# Altium PCB EtherWiz_FullSize.PcbDoc (part 2 of 2)
Units mm, origin at the board's own origin, x right, y up, seen from the top; angles counter-clockwise.
Board outline 160 x 100 mm, 4 copper layers (Top Layer, GND, 5V, Bottom Layer), stack 1.741 mm thick; 68 components, 129 nets, 452 pads, 231 vias.
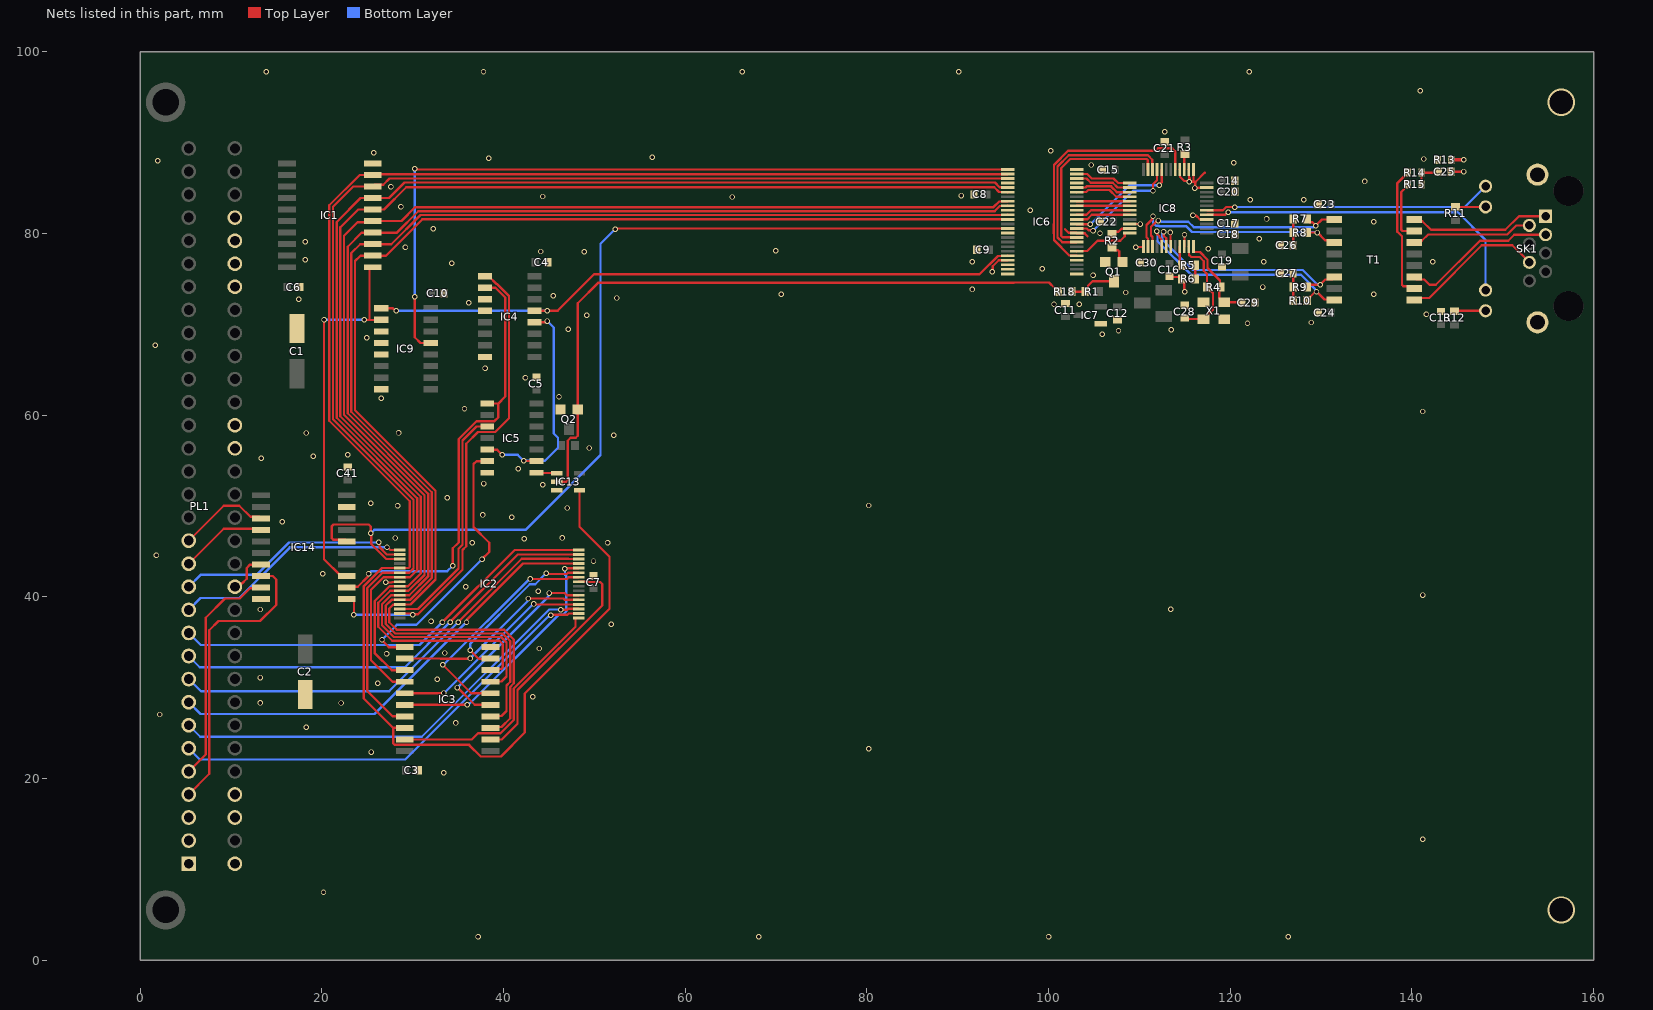
[diagram p4: the nets of this part, all layers, seen from the top]

## Via types
v1: diameter 0.6, hole 0.4, Top Layer to Bottom Layer, tented both sides, 229 vias
v2: diameter 3, hole 2.6, Top Layer to Bottom Layer, 2 vias

## Nets (pads, with @x,y where several pads share a name; then routed paths per layer and width w, separated by ;. In a path a pad name is that pad's centre, name@x,y a point inside that pad or via, vN(x,y) a via of type N, cw(c..) or ccw(c..) an arc to the next point about the centre after c; other vN are vias at no path point) (continued)
BLA3: IC2.19 IC6.14 IC14.16 | length 111
  Top Layer w0.254: IC14.16@22.759,46.101 22.561,46.299 21.265,46.299 21.082,46.482 21.082,47.752 21.303,47.973 25.179,47.973 25.4,47.752 v1(25.4,46.99) 25.446,46.944 25.446,45.81 27.091,44.166 IC2.19@28.578,44.166 ; v1(52.289,80.473) 52.382,80.473 52.459,80.55 IC6.14@95.512,80.55
  Bottom Layer w0.254: v1(25.4,46.99) 25.781,47.371 42.418,47.371 50.673,55.626 50.673,78.867 52.279,80.473 v1(52.289,80.473)
BLA12: IC2.31 IC4.1 IC14.11 | length 54.9
  Top Layer w0.254: IC14.11@22.759,39.751 23.34,39.751 23.538,39.553 v1(23.538,38.016) ; IC2.31@28.578,38.166 29.784,38.166 29.934,38.016 v1(30.028,38.016) 30.094,38.082 30.589,38.082 35.491,42.984 35.491,45.165 35.895,45.569 35.895,56.85 37.185,58.14 39.084,58.14 40.611,59.667 40.611,73.117 39.298,74.43 39.239,74.43 38.373,75.296 IC4.1@37.948,75.296
  Bottom Layer w0.254: v1(23.538,38.016) v1(30.028,38.016)
BLA13: IC4.2 IC5.1 IC14.12 | length 49.8
  Top Layer w0.254: IC14.12@22.759,41.021 22.849,41.111 23.966,41.111 25.08,42.225 25.08,42.479 v1(25.146,42.545) ; v1(34.417,43.434) 34.417,45.339 35.075,45.997 35.075,57.363 37.056,59.344 39.018,59.344 39.438,59.764 39.438,61.282 ; IC4.2@37.948,74.026 39.131,74.026 40.207,72.95 40.207,62.051 39.438,61.282 ; IC5.1@38.207,61.282 39.438,61.282
  Bottom Layer w0.254: v1(25.146,42.545) 25.183,42.545 25.468,42.829 33.812,42.829 v1(34.417,43.434)
BPR/W: IC1.1 IC9.2 IC14.13 | length 41.8
  Top Layer w0.254: v1(20.251,70.485) 20.251,44.149 22.109,42.291 IC14.13@22.759,42.291 ; v1@24.638,70.485 25.273,70.485 ; IC1.1@25.625,76.285 25.446,76.285 25.248,76.087 25.248,70.51 25.273,70.485 ; IC9.2@26.3,70.485 25.273,70.485
  Bottom Layer w0.254: v1(20.251,70.485) 20.268,70.502 24.667,70.502 v1(24.684,70.519)
C0_IDT: PL1.C20
C1_ICK: PL1.C19
CLK2: PL1.C27
CLK8: PL1.C28
D0: IC1.9 IC2.21 IC3.18 IC6.2 IC13.4 | length 193.5
  Top Layer w0.254: 27.868,25.576 24.604,28.84 24.604,41.135 26.635,43.166 IC2.21@28.578,43.166 29.535,43.166 29.684,43.315 29.684,50.518 20.828,59.374 20.828,83.099 24.174,86.445 IC1.9@25.625,86.445 25.707,86.527 95.489,86.527 IC6.2@95.512,86.55 ; IC3.18@29.128,25.576 27.884,25.576 27.876,25.568 27.876,24.746 27.876,23.866 28.038,23.704 36.218,23.704 37.488,22.434 39.717,22.434 42.352,25.069 42.352,29.369 51.671,38.688 51.671,44.404 48.369,47.706 IC13.4@48.369,51.722
D1: IC1.8 IC2.22 IC3.17 IC6.3 | length 141.7
  Top Layer w0.254: IC3.17@29.128,26.846 27.798,26.846 25.008,29.636 25.008,40.967 26.707,42.666 IC2.22@28.578,42.666 28.601,42.643 29.626,42.643 30.088,43.105 30.088,50.685 21.232,59.541 21.232,82.932 23.475,85.175 IC1.8@25.625,85.175 25.815,85.365 26.765,85.365 27.45,86.05 IC6.3@95.512,86.05
D2: IC1.7 IC2.23 IC3.14 IC6.5 | length 136.3
  Top Layer w0.254: IC3.14@29.128,30.656 27.788,30.656 25.412,33.032 25.412,40.789 26.789,42.166 IC2.23@28.578,42.166 29.72,42.166 30.492,42.938 30.492,50.852 21.636,59.708 21.636,81.272 24.269,83.905 IC1.7@25.625,83.905 27.405,83.905 29.1,85.6 94.1,85.6 94.627,85.073 95.489,85.073 IC6.5@95.512,85.05
D3: IC1.6 IC2.25 IC3.13 IC6.6 | length 132.7
  Top Layer w0.254: IC1.6@24.892,82.635 24.007,82.635 22.04,80.668 22.04,59.876 30.896,51.02 30.896,42.579 29.483,41.166 27.468,41.166 25.816,39.514 25.816,33.828 27.718,31.926 IC3.13@29.128,31.926 ; IC1.6@25.625,82.635 26.835,82.635 29.296,85.096 94.033,85.096 94.556,84.573 95.489,84.573 IC6.6@95.512,84.55
D4: IC1.5 IC2.26 IC3.8 IC6.8 | length 143.2
  Top Layer w0.254: IC3.8@38.578,31.926 38.715,32.063 39.772,32.063 39.928,32.219 39.928,34.808 39.57,35.166 27.764,35.166 26.22,36.71 26.22,39.346 27.54,40.666 29.554,40.666 31.3,42.412 31.3,51.187 22.444,60.043 22.444,79.744 23.93,81.23 25.49,81.23 IC1.5@25.625,81.365 28.765,81.365 30.3,82.9 93.942,82.9 94.569,83.527 95.489,83.527 IC6.8@95.512,83.55
D5: IC1.4 IC2.27 IC3.7 IC6.9 | length 143.4
  Top Layer w0.254: IC3.7@38.578,30.656 38.595,30.673 39.785,30.673 40.332,31.22 40.332,34.975 39.737,35.57 27.931,35.57 26.624,36.877 26.624,39.179 27.611,40.166 29.625,40.166 31.704,42.245 31.704,51.354 22.848,60.21 22.848,78.548 24.395,80.095 IC1.4@25.625,80.095 28.266,80.095 30.625,82.454 94.067,82.454 94.64,83.027 95.489,83.027 IC6.9@95.512,83.05
D6: IC1.3 IC2.28 IC3.4 IC6.11 | length 146.1
  Top Layer w0.254: IC3.4@38.578,26.846 38.605,26.873 39.785,26.873 40.332,27.42 40.332,30.242 40.736,30.646 40.736,35.142 39.904,35.974 28.099,35.974 27.028,37.045 27.028,39.011 27.683,39.666 29.697,39.666 32.108,42.077 32.108,51.522 23.252,60.378 23.252,77.852 24.225,78.825 IC1.3@25.625,78.825 27.654,78.825 30.856,82.027 95.489,82.027 IC6.11@95.512,82.05
D7: IC1.2 IC2.29 IC3.3 IC6.12 | length 146.3
  Top Layer w0.254: IC3.3@38.578,25.576 38.675,25.673 39.785,25.673 40.736,26.624 40.736,30.075 41.14,30.479 41.14,35.31 40.072,36.378 28.266,36.378 27.432,37.212 27.432,38.712 27.863,39.143 28.555,39.143 IC2.29@28.578,39.166 29.768,39.166 32.512,41.91 32.512,51.689 23.656,60.545 23.656,76.956 24.255,77.555 IC1.2@25.625,77.555 27.055,77.555 31.05,81.55 IC6.12@95.512,81.55
ERX_N: IC8.5 R10.2 T1.8 | length 26.8
  Top Layer w0.254: v1(111.912,80.243) 111.978,80.176 111.978,79.925 112.219,79.683 112.219,79.572 112.427,79.364 112.427,78.585 IC8.5@112.45,78.562 ; R10.2@128.45,72.6 128.45,72.675 129.309,73.534 129.434,73.534 v1(129.5,73.6) 130.368,72.732 131.373,72.732 T1.8@131.45,72.655
  Bottom Layer w0.254: v1(111.912,80.243) 111.978,80.176 111.978,79.925 112.004,79.898 112.004,79.14 115.675,75.469 127.772,75.469 129.343,73.898 129.343,73.851 129.5,73.694 v1(129.5,73.6)
ERX_P: IC8.6 R9.2 T1.6 | length 25.4
  Top Layer w0.254: v1(112.661,80.205) 112.669,80.196 112.669,79.758 112.949,79.479 112.949,78.563 IC8.6@112.95,78.562 ; R9.2@128.579,74.16 128.579,74.197 128.748,74.366 v1(129.893,74.366) 130.469,74.942 131.197,74.942 T1.6@131.45,75.195
  Bottom Layer w0.254: v1(112.661,80.205) 112.661,80.111 112.512,79.963 112.512,79.35 115.886,75.977 127.982,75.977 129.527,74.432 129.827,74.432 v1(129.893,74.366)
ETX_N: IC8.2 R8.2 T1.3 | length 26.4
  Top Layer w0.254: IC8.2@110.95,78.562 110.95,79.411 110.788,79.573 110.788,80.937 111.434,81.583 111.434,81.834 v1(111.5,81.9) ; R8.2@128.45,80.1 v1(129.6,80.1) 130.442,79.258 131.197,79.258 T1.3@131.45,79.005
  Bottom Layer w0.254: v1(111.5,81.9) 111.5,81.188 111.841,80.847 112.126,80.847 112.191,80.782 115.176,80.782 115.791,80.166 129.534,80.166 v1(129.6,80.1)
ETX_P: IC8.3 R7.2 T1.1 | length 24.7
  Top Layer w0.254: IC8.3@111.45,78.562 111.45,79.618 111.288,79.78 111.288,80.729 111.777,81.219 111.781,81.219 111.986,81.424 v1(112.08,81.424) ; R7.2@128.45,81.6 128.45,81.538 128.748,81.24 129.046,81.24 v1(129.418,80.869) 130.094,81.545 T1.1@131.45,81.545
  Bottom Layer w0.254: v1(112.08,81.424) 112.146,81.358 112.334,81.358 112.401,81.29 115.386,81.29 116.002,80.674 129.13,80.674 129.324,80.869 v1(129.418,80.869)
GND: C1.2 C2.2 C3.1 C4.1 C5.1 C6.1 C7.1 C8.1 C9.1 C10.1 C11.1 C12.1 C13.1 C14.1 C15.1 C16.1 C17.1 C18.1 C19.1 C20.1 C21.1 C22.1 C23.1 C24.1 C26.1 C27.1 C28.1 C29.1 C30.1 C41.1 IC1.10 IC2.24 IC3.10 IC4.3 IC4.4 IC4.8 IC5.7 IC6.4 IC6.10 IC6.15 IC6.21 IC6.22 IC6.23 IC6.24 IC6.25 IC6.28 IC6.34 IC6.39 IC6.45 IC6.48 IC7.1 IC8.1 IC8.7 IC8.10 IC8.16 IC8.23 IC8.25 IC8.26 IC8.28 IC8.46 IC9.3 IC9.4 IC9.5 IC9.8 IC13.3 IC14.10 IC14.19 PL1.A1 PL1.C1 PL1.C3 PL1.C4 PL1.C26 Q1.2 Q2.2 R6.1 R13.1 X1.2 X1.4 | length 25.6
  Top Layer w0.254: v1(27.028,41.589) 27.709,41.589 27.763,41.643 28.555,41.643 IC2.24@28.578,41.666 ; v1(93.8,75.8) 93.866,75.866 93.866,76.395 94.521,77.05 IC6.21@95.512,77.05 ; 101.814,80.46 102.201,80.073 103.065,80.073 IC6.34@103.088,80.05 103.111,80.027 103.973,80.027 104.3,79.7 ; IC8.46@108.962,81.05 108.968,81.044 110.099,81.044 v1(110.105,81.038) ; v1(109.6,78.5) 110.427,78.5 110.45,78.523 IC8.1@110.45,78.562 ; C16.1@113.3,75.2 114.45,75.2 R6.1@114.7,74.95 ; v1(113.405,80.111) 113.427,80.089 113.427,78.585 IC8.7@113.45,78.562 ; IC8.28@114.45,87.038 114.473,87.015 114.473,86.236 114.943,85.766 115.434,85.766 v1(115.5,85.7) ; R6.1@114.65,75 114.948,74.702 114.948,73.652 v1(115,73.6) ; IC8.10@114.95,78.562 114.958,78.57 114.958,79.858 v1(114.966,79.866) ; IC8.26@115.45,87.038 115.473,87.015 115.473,86.067 ; 115.566,86.067 115.566,85.766 v1(115.5,85.7) ; v1(115.9,82) 115.966,81.934 116.275,81.934 116.636,81.573 117.415,81.573 IC8.16@117.438,81.55 ; IC8.25@115.95,87.038 115.95,85.7 ; v1(116.1,85) v1@116.127,85.027 ; 117.2,86.7 116.2,85.7 ; IC8.23@117.438,85.05 117.415,85.027 v1@116.127,85.027 ; v1(115.5,85.7) 115.95,85.7 ; 115.95,85.7 116.2,85.7 ; v1@116.127,85.027 116.166,85.066 116.166,85.666 116.2,85.7
  other v1: 37.2,2.6 68.1,2.6 100,2.6 126.4,2.6 20.187,7.476 141.2,13.3 33.428,20.616 25.428,22.916 80.198,23.258 18.288,25.654 34.728,26.116 2.18,27.046 13.208,28.321 22.119,28.316 43.228,29.016 26.162,30.48 32.728,30.916 13.208,31.115 27.128,33.716 33.552,33.818 43.928,34.316 51.871,36.975 32.028,37.316 13.208,38.608 113.472,38.625 141.2,40.2 43.828,40.616 35.828,41.116 20.087,42.54 49.911,43.942 1.799,44.572 36.576,45.974 51.456,45.969 42.269,46.411 28.088,46.477 46.482,46.482 15.642,48.255 40.915,48.763 37.728,49.016 47.011,49.779 28.342,50.033 80.198,50.055 25.4,50.292 33.803,50.922 44.323,52.324 37.811,52.472 41.632,54.103 13.356,55.24 19.071,55.494 22.86,55.626 49.424,56.383 52.131,57.802 18.309,58.034 28.448,58.039 141.2,60.4 35.708,60.701 26.543,61.849 46.111,62.016 42.418,64.135 37.973,65.151 1.672,67.686 24.936,68.511 105.9,68.9 107.7,69.3 113.5,69.4 47.117,69.469 121.9,70.1 128.9,70.2 49.17,70.988 141.6,71.1 100.6,72.2 103.4,72.2 36.195,72.39 17.468,72.752 52.451,72.898 45.487,73.147 70.588,73.314 135.792,73.327 108.5,73.5 91.619,73.836 123.6,74.1 104.9,75.4 99.3,76.1 34.29,76.708 91.6,76.9 123.7,76.9 142.3,76.9 18.2,77.1 48.895,77.978 44.098,78.016 69.988,78.114 117.6,78.3 29.21,78.486 18.2,79.1 123.2,79.4 105.664,80.016 32.279,80.513 135.8,81.3 124,81.6 97.998,82.538 28.716,82.961 122.2,83.7 128.1,83.7 65.188,84.014 44.344,84.069 90.373,84.173 27.616,85.161 134.792,85.727 104.692,87.536 120.4,87.8 1.926,88.006 141.3,88.2 38.375,88.26 56.388,88.392 25.728,88.893 100.224,89.109 112.8,91.2 140.9,95.7 13.9,97.8 37.8,97.8 66.3,97.8 90.1,97.8 122.1,97.8
GND_CHASS: C25.1 R13.2 SK1.S1 SK1.S2 | length 2.8
  Top Layer w0.254: C25.1@144.3,86.8 v1@145.7,86.8
  Top Layer w0.4: R13.2@144.35,88.1 v1(145.7,88.1)
  other v1: 145.714,86.815
  other v2: 156.439,5.537 156.439,94.437
INT_3v3: IC13.2 Q2.1 R18.2 | length 75.8
  Top Layer w0.254: IC13.2@45.869,52.672 46.922,52.672 47.071,52.821 47.071,57.191 47.382,57.502 47.944,57.502 48.172,57.73 48.172,72.311 50.452,74.592 96.192,74.592 96.2,74.6 100.05,74.6 100.677,73.973 100.752,73.973 101.05,73.675 R18.2@101.05,73.6
INT_Read_nEN: IC5.8 IC13.1 | length 2.3
  Top Layer w0.254: IC5.8@43.631,53.662 43.651,53.642 45.849,53.642 IC13.1@45.869,53.622
LA2: IC14.3 PL1.A15 | length 10.1
  Top Layer w0.254: PL1.A15@5.35,46.185 9.203,50.038 10.922,50.038 12.149,48.811 13.139,48.811 IC14.3@13.309,48.641
LA3: IC14.4 PL1.A14 | length 9.6
  Top Layer w0.254: PL1.A14@5.35,43.645 9.203,47.498 13.182,47.498 IC14.4@13.309,47.371
LA4: IC2.18 PL1.A13 | length 26.1
  Top Layer w0.254: v1(26.289,46.02) 26.355,45.954 26.355,45.473 27.162,44.666 IC2.18@28.578,44.666
  Bottom Layer w0.254: PL1.A13@5.35,41.105 6.663,42.418 12.827,42.418 16.383,45.974 26.243,45.974 v1(26.289,46.02)
LA5: IC2.17 PL1.A12 | length 26.2
  Top Layer w0.254: v1(27.178,45.466) 27.247,45.466 27.547,45.166 IC2.17@28.578,45.166
  Bottom Layer w0.254: PL1.A12@5.35,38.565 6.663,39.878 10.922,39.878 16.487,45.443 27.155,45.443 v1(27.178,45.466)
LA6: IC2.16 PL1.A11 | length 47.8
  Top Layer w0.254: v1(33.286,37.222) 41.229,45.166 IC2.16@48.278,45.166
  Bottom Layer w0.254: PL1.A11@5.35,36.025 6.675,34.7 30.763,34.7 v1(33.286,37.222)
LA7: IC2.15 PL1.A10 | length 48.6
  Top Layer w0.254: v1(34.128,37.216) 41.578,44.666 IC2.15@48.278,44.666
  Bottom Layer w0.254: PL1.A10@5.35,33.485 6.577,32.258 29.17,32.258 v1(34.128,37.216)
LA8: IC2.14 PL1.A9 | length 49.5
  Top Layer w0.254: v1(35.028,37.216) 42.009,44.197 47.134,44.197 47.165,44.166 IC2.14@48.278,44.166
  Bottom Layer w0.254: PL1.A9@5.35,30.945 6.695,29.6 27.412,29.6 v1(35.028,37.216)
LA9: IC2.13 PL1.A8 | length 50.5
  Top Layer w0.254: v1(35.928,37.216) 35.994,37.282 35.994,37.518 42.142,43.666 IC2.13@48.278,43.666
  Bottom Layer w0.254: PL1.A8@5.35,28.405 6.655,27.1 25.812,27.1 v1(35.928,37.216)
LA10: IC2.3 PL1.A7 | length 49.3
  Top Layer w0.254: v1(46.301,38.589) 47.009,38.589 47.109,38.689 48.255,38.689 IC2.3@48.278,38.666
  Bottom Layer w0.254: PL1.A7@5.35,25.865 6.615,24.6 31.012,24.6 45.028,38.616 46.274,38.616 v1(46.301,38.589)
LA11: IC2.2 PL1.A6 | length 50.1
  Top Layer w0.254: v1(45.186,37.958) 45.24,38.012 47.024,38.012 47.178,38.166 IC2.2@48.278,38.166
  Bottom Layer w0.254: PL1.A6@5.35,23.325 6.575,22.1 29.196,22.1 44.892,37.796 44.931,37.796 45.092,37.958 v1(45.186,37.958)
LA12: IC14.9 PL1.A5 | length 25.2
  Top Layer w0.254: PL1.A5@5.35,20.785 7.216,22.651 7.216,37.696 9.336,39.816 10.977,39.816 12.102,40.941 13.229,40.941 IC14.9@13.309,41.021
LA13: IC14.8 PL1.A4 | length 32.2
  Top Layer w0.254: PL1.A4@5.35,18.245 7.62,20.515 7.62,36.322 8.636,37.338 13.208,37.338 14.986,39.116 14.986,41.91 14.605,42.291 IC14.8@13.309,42.291
LA14: PL1.A3
LA15: PL1.A2
LINK: IC8.17 SK1.11 | length 37.6
  Top Layer w0.254: IC8.17@117.438,82.05 117.461,82.073 119.452,82.073 119.706,82.327 v1(119.8,82.327)
  Bottom Layer w0.254: v1(119.8,82.327) 145.073,82.327 148.106,79.294 SK1.11@148.106,73.773
NetC25_2: C25.2 R14.1 R15.1 | length 3.2
  Top Layer w0.254: R15.1@141.05,85.4 R14.1@141.05,86.7 142.8,86.7 C25.2@142.9,86.8
NetC26_2: C26.2 R7.1 R8.1 | length 3
  Top Layer w0.254: C26.2@126.9,78.6 126.95,78.65 R8.1@126.95,80.1 R7.1@126.95,81.6
NetC27_2: C27.2 R9.1 R10.1 | length 2.6
  Top Layer w0.254: R10.1@126.95,72.6 126.95,73.9 C27.2@126.95,75.2
NetC28_2: C28.2 IC8.11 R4.2 X1.1 | length 12.2
  Top Layer w0.254: C28.2@115,70.7 115.125,70.575 X1.1@117.05,70.575 118.1,71.625 118.1,73.45 117.823,73.727 117.748,73.727 117.45,74.025 117.45,75.532 117.096,75.886 117.096,76.946 116.642,77.4 115.7,77.4 115.473,77.627 115.473,78.539 IC8.11@115.45,78.562
NetC29_2: C29.2 IC8.12 R4.1 X1.3 | length 10.1
  Top Layer w0.254: IC8.12@115.95,78.562 115.95,77.974 115.973,77.951 116.662,77.951 117.5,77.113 117.5,76.2 118.868,74.832 118.868,74.182 R4.1@118.95,74.1 118.8,73.95 118.8,72.972 118.827,72.945 118.827,72.823 119.225,72.425 121.275,72.425 C29.2@121.3,72.4
NetIC8_9: IC8.9 R5.2 | length 2.1
  Top Layer w0.254: IC8.9@114.45,78.562 114.45,76.7 R5.2@114.65,76.5
NetIC8_27: IC8.27 R3.1 | length 1.7
  Top Layer w0.254: IC8.27@114.95,87.038 114.95,88.7 R3.1@115,88.75
NetIC8_47: IC8.47 R2.1 | length 2.3
  Top Layer w0.254: R2.1@107.05,79.8 107.05,79.875 107.348,80.173 107.673,80.173 108.027,80.527 108.939,80.527 IC8.47@108.962,80.55
NetQ1_1: Q1.1 R2.2 | length 2.3
  Top Layer w0.254: R2.2@107,78.45 107.298,78.152 107.648,78.152 107.8,78 107.8,77.299 108.221,76.877 Q1.1@108.242,76.877
NetQ1_3: Q1.3 R1.1 R18.1 | length 5.3
  Top Layer w0.254: R18.1@102.55,73.6 R1.1@104.05,73.6 104.348,73.898 104.348,74.248 104.833,74.733 Q1.3@107.206,74.733
NetR5_1: R5.1 R6.2 | length 1.5
  Top Layer w0.254: R6.2@116.15,75 R5.1@116.15,76.5
NetR11_1: R11.1 SK1.10 | length 3.3
  Top Layer w0.254: R11.1@144.8,82.95 144.833,82.917 SK1.10@148.106,82.917
NetR12_1: R12.1 SK1.12 | length 3.4
  Top Layer w0.254: R12.1@144.7,71.45 144.737,71.487 SK1.12@148.106,71.487
NetR14_2: R14.2 T1.10 | length 14.6
  Top Layer w0.254: R14.2@139.55,86.7 139.55,86.6 139.4,86.45 139.305,86.45 138.4,85.545 138.4,80.2 138.9,79.7 138.9,74.327 139.049,74.178 139.997,74.178 T1.10@140.25,73.925
NetR15_2: R15.2 T1.15 | length 6.8
  Top Layer w0.254: R15.2@139.55,85.4 139.55,85.3 138.825,84.575 138.825,80.424 138.974,80.275 T1.15@140.25,80.275
PA0: IC2.1 IC3.19 | length 27.3
  Top Layer w0.254: IC3.19@29.128,24.306 36.518,24.306 37.186,24.974 39.668,24.974 41.14,26.446 41.14,29.908 47.928,36.696 47.928,37.643 47.951,37.666 IC2.1@48.278,37.666
PA1: IC2.12 IC3.16 | length 28.4
  Top Layer w0.254: IC3.16@29.128,28.116 v1(36.028,28.116) ; v1(46.728,43.089) 46.782,43.143 48.255,43.143 IC2.12@48.278,43.166
  Bottom Layer w0.254: v1(36.028,28.116) 36.122,28.116 36.283,28.278 36.322,28.278 46.056,38.012 46.54,38.012 46.905,38.377 46.905,42.281 46.778,42.408 46.778,43.039 v1(46.728,43.089)
PA2: IC2.4 IC3.15 | length 23.2
  Top Layer w0.254: IC3.15@29.128,29.386 29.143,29.401 33.413,29.401 v1(33.428,29.416) ; v1(43.328,39.216) 43.378,39.166 IC2.4@48.278,39.166
  Bottom Layer w0.254: v1(33.428,29.416) 33.478,29.416 43.278,39.216 v1(43.328,39.216)
PA3: IC2.5 IC3.12 | length 22.1
  Top Layer w0.254: IC3.12@29.128,33.196 29.138,33.206 33.07,33.206 33.075,33.201 36.313,33.201 v1(36.328,33.216) ; v1(42.728,39.816) 46.615,39.816 46.765,39.666 IC2.5@48.278,39.666
  Bottom Layer w0.254: v1(36.328,33.216) 42.662,39.55 42.662,39.75 v1(42.728,39.816)
PA4: IC2.11 IC3.9 | length 18.6
  Top Layer w0.254: v1(36.328,34.116) 37.248,33.196 IC3.9@38.578,33.196 ; v1(44.728,42.616) 44.822,42.616 44.926,42.512 46.967,42.512 47.121,42.666 IC2.11@48.278,42.666
  Bottom Layer w0.254: v1(36.328,34.116) 36.328,34.816 42.905,41.393 43.489,41.393 44.712,42.616 v1(44.728,42.616)
PA5: IC2.10 IC3.6 | length 25.5
  Top Layer w0.254: v1(33.328,32.516) 36.458,29.386 IC3.6@38.578,29.386 ; v1(42.928,41.97) 46.996,41.97 47.192,42.166 IC2.10@48.278,42.166
  Bottom Layer w0.254: v1(33.328,32.516) 33.401,32.516 42.855,41.97 v1(42.928,41.97)
PA6: IC2.6 IC3.5 | length 22.4
  Top Layer w0.254: v1(34.928,30.016) 34.944,30.016 36.844,28.116 IC3.5@38.578,28.116 ; v1(45.028,40.416) 46.709,40.416 46.959,40.166 IC2.6@48.278,40.166
  Bottom Layer w0.254: v1(34.928,30.016) 34.944,30.016 44.962,40.034 44.962,40.35 v1(45.028,40.416)
PA7: IC2.9 IC3.2 | length 25.6
  Top Layer w0.254: IC3.2@38.578,24.306 39.818,24.306 41.544,26.032 41.544,29.74 50.863,39.059 50.863,41.423 50.647,41.639 49.363,41.639 49.313,41.689 48.301,41.689 IC2.9@48.278,41.666
PR/W: IC14.7 PL1.C13 | length 4.6
  Top Layer w0.254: PL1.C13@10.43,41.105 10.8,41.105 11.176,41.482 11.23,41.482 11.739,41.991 11.739,43.183 12.102,43.545 13.293,43.545 IC14.7@13.309,43.561
REF8M: PL1.C29
ROM_Latch_nEN: IC3.11 IC5.6 | length 30.7
  Top Layer w0.254: v1(26.628,35.277) 26.628,35.21 27.372,34.466 IC3.11@29.128,34.466 ; v1(37.64,44.127) 37.64,44.151 38.423,44.934 38.423,45.959 36.703,47.679 36.703,54.61 37.025,54.932 IC5.6@38.207,54.932
  Bottom Layer w0.254: v1(26.628,35.277) 28.267,36.916 30.412,36.916 37.623,44.127 v1(37.64,44.127)
ROM_Latch_nSel: IC4.12 IC5.5 IC5.9 | length 26.2
  Top Layer w0.254: IC5.5@38.207,56.202 39.302,56.202 v1(39.878,55.626) ; v1(42.219,54.972) 42.239,54.952 43.611,54.952 IC5.9@43.631,54.932 ; IC4.12@43.398,70.216 44.595,70.216 44.737,70.358 v1(44.831,70.358)
  Bottom Layer w0.254: v1(39.878,55.626) 41.565,55.626 v1(42.219,54.972) 44.558,54.972 45.996,56.41 45.996,57.509 45.534,57.971 45.534,69.655 v1(44.831,70.358)
ROM_nCS: IC2.30 IC5.3 | length 25.9
  Top Layer w0.254: IC2.30@28.578,38.666 30.602,38.666 35.052,43.116 35.052,45.297 35.491,45.736 35.491,57.208 37.025,58.742 IC5.3@38.207,58.742
RX_N: SK1.6 T1.9 | length 16
  Top Layer w0.254: T1.9@140.25,72.655 140.495,72.9 141.9,72.9 147.7,78.7 151.053,78.7 SK1.6@152.932,76.821
RX_P: SK1.3 T1.11 | length 17.1
  Top Layer w0.254: T1.11@140.25,75.195 140.503,74.942 141.358,74.942 141.951,74.349 142.63,74.349 147.49,79.208 150.608,79.208 151.269,79.869 SK1.3@154.71,79.869
SPEED: IC8.18 SK1.9 | length 31.8
  Top Layer w0.254: IC8.18@117.438,82.55 119.199,82.55 119.553,82.904 v1(120.5,82.904)
  Bottom Layer w0.254: v1(120.5,82.904) 145.807,82.904 SK1.9@148.106,85.203
TX_N: SK1.2 T1.14 | length 13.5
  Top Layer w0.254: T1.14@140.25,79.005 140.44,79.195 141.095,79.195 141.792,79.892 150.492,79.892 151.485,80.885 SK1.2@152.932,80.885
TX_P: SK1.1 T1.16 | length 15.6
  Top Layer w0.254: T1.16@140.25,81.545 140.44,81.355 141.145,81.355 142.1,80.4 150.282,80.4 151.783,81.901 SK1.1@154.71,81.901
Wiz5_PR/W: IC6.1 IC9.13 | length 85.9
  Top Layer w0.254: v1(30.226,73.025) 30.226,68.58 30.861,67.945 IC9.13@31.993,67.945 ; v1(30.226,87.122) 30.292,87.056 30.537,87.056 30.543,87.05 IC6.1@95.512,87.05
  Bottom Layer w0.254: v1(30.226,73.025) v1(30.226,87.122)
Wiz_A0: IC6.36 IC8.32 | length 12.8
  Top Layer w0.254: IC6.36@103.088,81.05 103.111,81.027 104.573,81.027 v1(104.6,81) ; v1(112.2,85.3) 112.2,85.394 112.45,85.644 IC8.32@112.45,87.038
  Bottom Layer w0.254: v1(104.6,81) 108.9,85.3 v1(112.2,85.3)
Wiz_A1: IC6.35 IC8.33 | length 12.9
  Top Layer w0.254: IC6.35@103.088,80.55 104.207,80.55 104.39,80.366 104.834,80.366 v1(104.9,80.3) ; v1(111.5,84.7) 111.5,85.416 111.95,85.866 IC8.33@111.95,87.038
  Bottom Layer w0.254: v1(104.9,80.3) 109.3,84.7 v1(111.5,84.7)
Wiz_D0: IC6.47 IC8.37 | length 6.3
  Top Layer w0.254: IC6.47@103.088,86.55 104.25,86.55 104.75,86.05 107.164,86.05 107.664,85.55 IC8.37@108.962,85.55
Wiz_D1: IC6.46 IC8.38 | length 6.3
  Top Layer w0.254: IC6.46@103.088,86.05 104.179,86.05 104.644,85.585 107.058,85.585 107.593,85.05 IC8.38@108.962,85.05
Wiz_D2: IC6.44 IC8.39 | length 6.2
  Top Layer w0.254: IC6.44@103.088,85.05 104.063,85.05 104.194,85.181 106.89,85.181 107.521,84.55 IC8.39@108.962,84.55
Wiz_D3: IC6.43 IC8.40 | length 6.3
  Top Layer w0.254: IC6.43@103.088,84.55 103.111,84.573 104.157,84.573 104.361,84.777 106.723,84.777 107.45,84.05 IC8.40@108.962,84.05
Wiz_D4: IC6.41 IC8.41 | length 5.9
  Top Layer w0.254: IC6.41@103.088,83.55 IC8.41@108.962,83.55
Wiz_D5: IC6.40 IC8.42 | length 5.9
  Top Layer w0.254: IC6.40@103.088,83.05 IC8.42@108.962,83.05
Wiz_D6: IC6.38 IC8.43 | length 6.1
  Top Layer w0.254: IC6.38@103.088,82.05 104.179,82.05 104.679,82.55 IC8.43@108.962,82.55
Wiz_D7: IC6.37 IC8.44 | length 6.1
  Top Layer w0.254: IC6.37@103.088,81.55 104.25,81.55 104.75,82.05 IC8.44@108.962,82.05
Wiz_nRD: IC6.32 IC8.34 | length 22.4
  Top Layer w0.254: IC6.32@103.088,79.05 101.5,79.05 100.996,79.554 100.996,80.161 100.992,80.165 100.992,80.835 100.996,80.839 100.996,87.367 102.233,88.604 102.791,88.604 110.946,88.604 111.427,88.123 111.427,87.061 IC8.34@111.45,87.038
Wiz_nRst: IC6.30 IC8.48 | length 6.9
  Top Layer w0.254: IC6.30@103.088,78.05 103.111,78.073 104.273,78.073 105.4,79.2 107.9,79.2 108.397,79.697 108.397,80.027 108.42,80.05 IC8.48@108.962,80.05
Wiz_nSel: IC6.29 IC8.29 | length 27.7
  Top Layer w0.254: IC6.29@103.088,77.55 103.065,77.573 102.286,77.573 100.592,79.267 100.592,79.994 100.588,79.998 100.588,81.002 100.592,81.006 100.592,87.535 102.157,89.1 111.8,89.1 112.077,89.377 113.616,89.377 113.95,89.043 IC8.29@113.95,87.038
Wiz_nSel5: IC4.13 IC6.20 IC9.1 | length 73.1
  Top Layer w0.254: IC9.1@26.543,71.755 27.846,71.755 28.1,71.501 v1(28.194,71.501) ; IC4.13@43.398,71.486 45.959,71.486 49.973,75.5 92.4,75.5 94.427,77.527 95.489,77.527 IC6.20@95.512,77.55
  Bottom Layer w0.254: v1@28.1,71.501 v1(44.831,71.501)
Wiz_nWR: IC6.33 IC8.35 | length 20.3
  Top Layer w0.254: IC6.33@103.088,79.55 103.065,79.573 101.549,79.573 101.4,79.722 101.4,80.329 101.396,80.333 101.396,80.667 101.4,80.671 101.4,87.2 102.4,88.2 110.778,88.2 110.927,88.051 110.927,87.061 IC8.35@110.95,87.038
pads on no net: IC4.7 IC4.9 IC4.10 IC4.11 IC4.14 IC4.15 IC6.26 IC6.27 IC8.19 IC8.20 IC8.21 IC8.30 IC9.7 IC9.9 IC9.10 IC9.11 IC9.12 IC9.14 IC9.15 PL1.C5 PL1.C7 PL1.C8 PL1.C9 PL1.C10 PL1.C11 PL1.C31 PL1.MH1 PL1.MH2 SK1. SK1.4 SK1.5 SK1.7 SK1.8 T1.4 T1.5 T1.12 T1.13

## Polygon pours and split planes (outlines as drawn)
GND on Bottom Layer "GND_L04_P005" (solid, remove dead copper, pour order 5): 0,0 143.9,0 143.9,100 0,100
GND_CHASS on Bottom Layer "GND_CHASS_L04_P006" (solid, pour order 6): 160,100.076 144.7,100.076 144.7,0 160,0
5V on 5V "5V_L03_P007" (solid, remove dead copper, pour order 7): 0,0 160,0 160,100 0,100
3v3 on 5V "3V3_L03_P003" (solid, remove dead copper, pour order 3): 160,100 160,62.6 102.6,62.6 102.6,100
GND on Top Layer "GND_L01_P009" (solid, remove dead copper, pour order 9): 0,0 160,0 160,100 0,100
1v2d on Top Layer "1V2D_L01_P011" (solid, pour order 11): 110.1,85.9 116.3,85.9 116.3,79.7 110.1,79.7
1v2d on Top Layer "1V2D_L01_P004" (solid, remove dead copper, pour order 4): 110.1,85.9 116.3,85.9 116.3,79.7 110.1,79.7
GND on GND "GND_L02_P002" (solid, pour order 2): 0,0 160,0 160,100 0,100

## Keep-outs
Keep-Out Layer:
  the board outline again, w0.254

## Other copper
Top Layer:
  text ".Project_Title" at 131.854,97.254 h1.52
  text ".PCB_RevNo" at 145.145,97.254 h1.52

## Silkscreen, mask and mechanical layers (free items; w line width, h text height)
Top Overlay:
  text ".Project_Title" at 16.2,94 h3
  text ".PCB_RevNo" at 42.2,94 h3
  text "(C) IanJ '26" at 15.654,90.454 h1.52
  text "HCT245" at 21.136,79.321 h1 r90
  text "ALVC164245" at 99.749,76.654 h1 r90
  text "HCT138" at 41.202,67.764 h1 r90
  text "HCT238" at 29.899,64.589 h1 r90
  text "HCT32" at 41.487,54.861 h1 r90
  text "HCT245" at 18.627,42.415 h1 r90
  text "MX29F040C" at 34.617,40.713 h1
  text "HCT273" at 34.375,25.905 h1 r90
Board Shape:
  the board outline again, w0.254